# EAGLE board NodeMCU_SMD1206 (EAGLE 9.6.2)
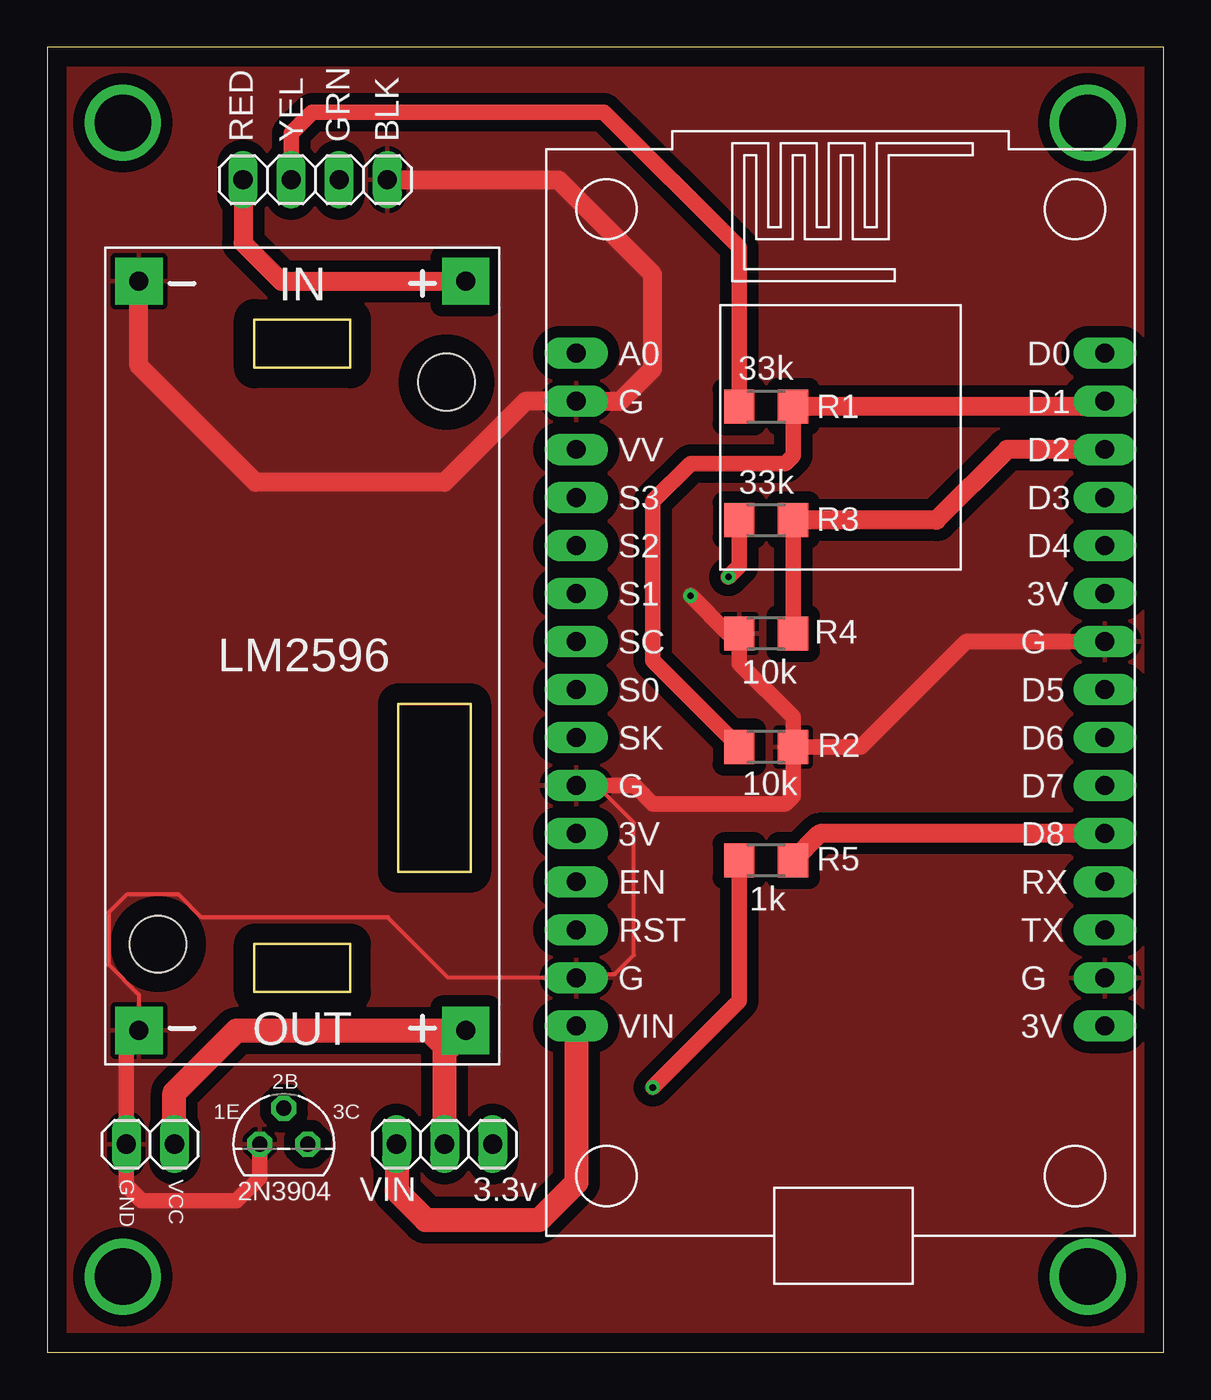
[diagram p0: board, top side]
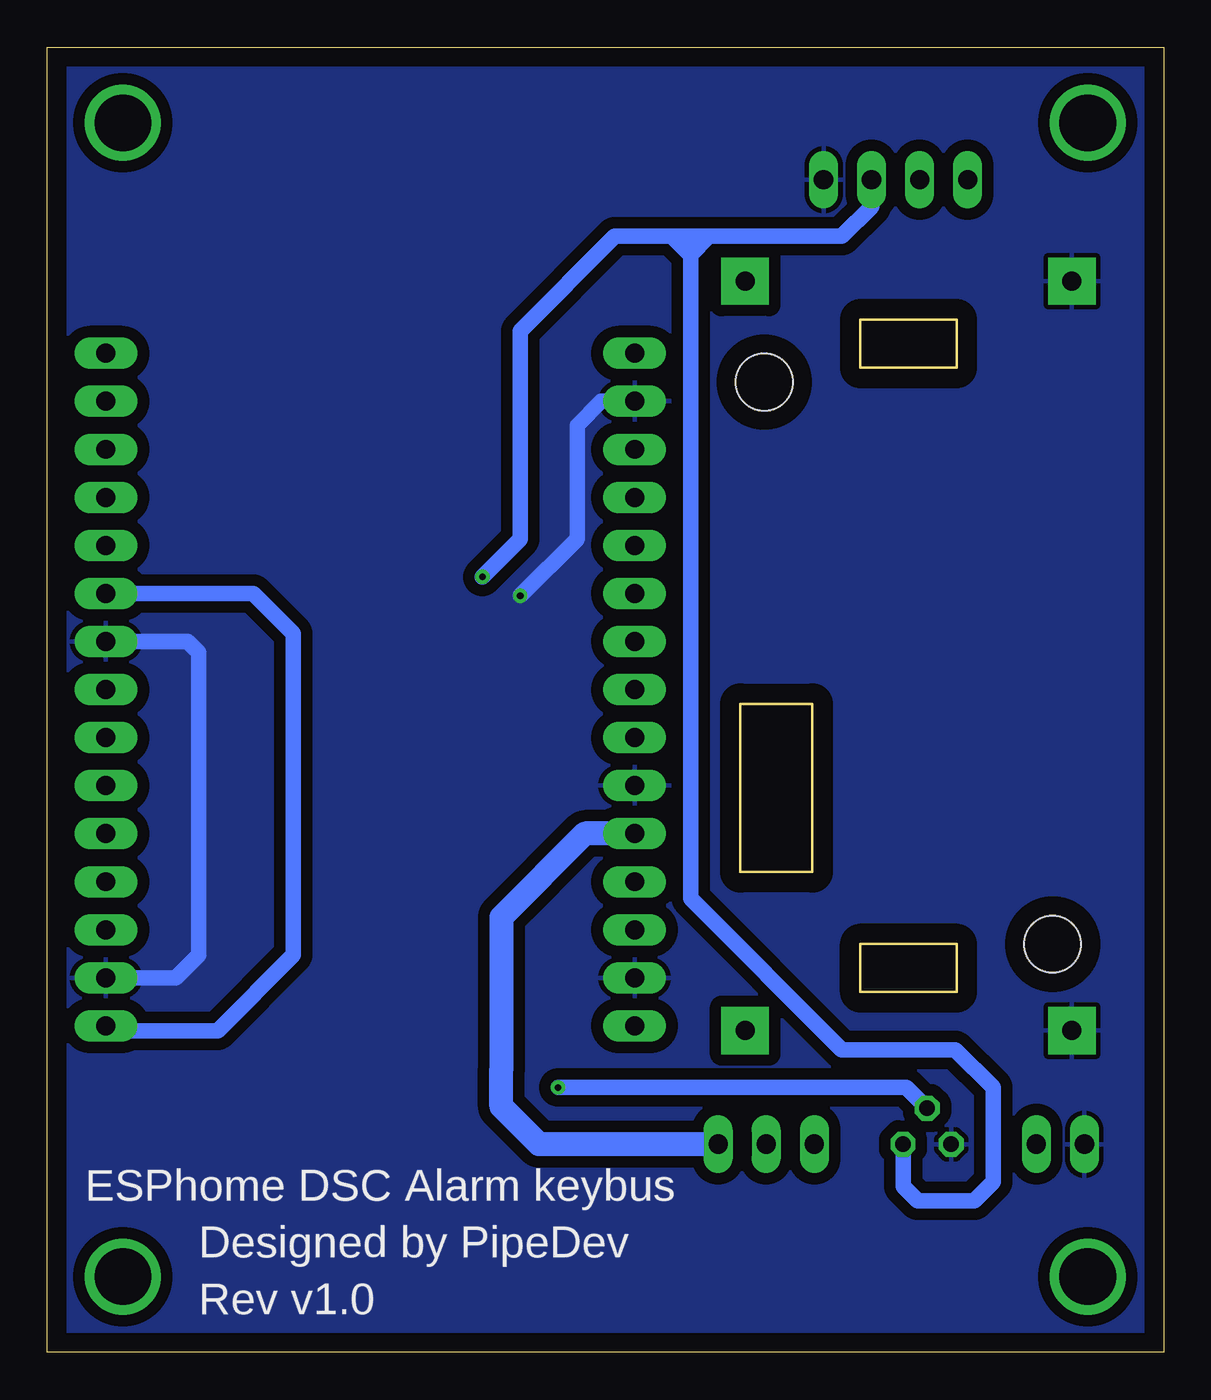
[diagram p1: board, bottom side, seen from below]

Size 59 x 69 mm. Coordinates in mm from the lower left corner, seen from the top.
Outline: 0,0 59,0 59,69 0,69 0,0
Copper layers (1*16): Top 0.035mm / dielectric 1.5mm / Bottom 0.035mm
Design rules "default": minimum track width 6mil, minimum drill 0.35mm, track to track 6mil, track to pad 6mil, pad to pad 6mil, via to via 6mil, smd to smd 6mil, copper to edge 40mil, drill to drill 6mil, minimum pad ring 10mil, minimum via ring 8mil, stop-mask expansion 4mil, vias tented up to drill 0mil, thermal gap 10mil

## Footprints (pad centres in the part's own frame; a part is rotated, then mirrored left to right if it is on the bottom)
1X02 = drill 1.016 long: 1 -1.27,0; 2 1.27,0
1X03 = drill 1.016 long: 1 -2.54,0; 2 0,0; 3 2.54,0
R1206 = smd 1.6 x 1.803: 1 -1.422,0; 2 1.422,0
TO92 = drill 0.813 octagon: 1 1.27,0; 2 0,1.905; 3 -1.27,0
1X04 = drill 1.016 long: 1 -3.81,0; 2 -1.27,0; 3 1.27,0; 4 3.81,0
NODEMCU = drill 1 pad 1.676 long: 1 -13.97,17.78; 2 -13.97,15.24; 3 -13.97,12.7; 4 -13.97,10.16; 5 -13.97,7.62; 6 -13.97,5.08; 7 -13.97,2.54; 8 -13.97,0; 9 -13.97,-2.54; 10 -13.97,-5.08; 11 -13.97,-7.62; 12 -13.97,-10.16; 13 -13.97,-12.7; 14 -13.97,-15.24; 15 -13.97,-17.78; 16 13.97,-17.78; 17 13.97,-15.24; 18 13.97,-12.7; 19 13.97,-10.16; 20 13.97,-7.62; 21 13.97,-5.08; 22 13.97,-2.54; 23 13.97,0; 24 13.97,2.54; 25 13.97,5.08; 26 13.97,7.62; 27 13.97,10.16; 28 13.97,12.7; 29 13.97,15.24; 30 13.97,17.78
DC-DC-STEP-DOWN-LM2596 = drill 1 pad 2.5 square: IN+ -19.812,8.636; IN- -19.812,-8.636; OUT+ 19.812,8.636; OUT- 19.812,-8.636 | hole 3: -14.478,7.62; 15.24,-7.62

## Placement (x,y rotation side)
JP2  [1X02]  5.45,11 180 top
JUMPERS  [1X03]  21,11 180 top
R1  33k  [R1206]  38,50 180 top
R2  10k  [R1206]  38,32 0 top
R3  33k  [R1206]  38,44 180 top
R4  10k  [R1206]  38,38 0 top
R5  1k  [R1206]  38,26 0 top
T1  2N3904  [TO92]  12.5,11 0 top
TERMINALBLOCK  [1X04]  14.16,62 0 top
U$1  NODEMCU  [NODEMCU]  41.93,35.04 0 top
U$2  DC-DC-STEP-DOWN-LM2596  [DC-DC-STEP-DOWN-LM2596]  13.48,36.82 270 top

## Library data of the parts
JP2 TERMINALBLOCK = pinhead
JUMPERS = pinheadDSC1
R1-R5 = rcl; SPICEPREFIX: R
T1 = transistor
U$1 = nodemcu
U$2 = diy-modules

## Nets
3V: U$1.16 U$1.25
GND: JP2.2 R2.2 R4.1 T1.3 TERMINALBLOCK.4 U$1.2 U$1.10 U$1.14 U$1.17 U$1.24 U$2.IN- U$2.OUT-
N$1: R1.1 R2.1 U$1.29
N$2: R1.2 TERMINALBLOCK.2
N$3: R3.1 R4.2 U$1.28
N$4: R3.2 T1.1 TERMINALBLOCK.3
N$5: TERMINALBLOCK.1 U$2.IN+
N$6: JP2.1 JUMPERS.2 U$2.OUT+
N$7: R5.1 T1.2
N$8: R5.2 U$1.20
N$9: JUMPERS.3 U$1.15
N$10: JUMPERS.1 U$1.11

## Tracks (layer width: path | path; a pad name or v marks a point on that pad's centre or on a via)
3V
  Bottom 0.813: U$1.16 55.64,17 50,17 46,21 46,38 48.12,40.12 U$1.25
GND  (via drill 0.35)
  Top 0.2: U$2.OUT- 4.84,18.9 3.24,20.5 3.24,23.24 4.2,24.2 6.94,24.2 8.14,23 18,23 21.2,19.8 U$1.14 28.16,20 30,20 31,21 31,28 29.04,29.96 U$1.10
  Top 0.813: v34,40 36,38 R4.1 36.58,36.42 39.42,33.58 R2.2 | U$1.24 48.58,37.58 43,32 R2.2 | U$1.10 31.04,29.96 32,29 39,29 39.42,29.42 R2.2 | U$2.OUT- 4.18,16.34 JP2.2 4.18,8.82 5,8 10,8 11.23,9.23 T1.3
  Top 1: TERMINALBLOCK.4 27.01,61.99 32,57 32,52 30.28,50.28 U$1.2 25.28,50.28 21,46 11,46 4.84,52.16 U$2.IN-
  Bottom 0.813: v34,40 31,43 31,49 29.72,50.28 U$1.2 | U$1.24 51.58,37.58 51,37 51,21 52.2,19.8 U$1.17
  pour Top (isolate 0.61): 0,69 59,69 59,0 0,0
  pour Bottom (isolate 0.61): 0,69 59,69 59,0 0,0
N$1
  Top 0.813: R1.1 39.42,47.42 39,47 34,47 32,45 32,36.58 R2.1
  Top 1: U$1.29 55.62,50 R1.1
N$2
  Top 0.813: TERMINALBLOCK.2 12.89,64.47 14,65.58 29.42,65.58 36.58,58.42 R1.2
N$3
  Top 0.813: R3.1 R4.2
  Top 1: U$1.28 50.74,47.74 47,44 R3.1
N$4  (via drill 0.35)
  Top 0.813: R3.2 36.58,41.58 v36,41
  Bottom 0.813: TERMINALBLOCK.3 15.43,60.57 17,59 24,59 | v36,41 34,43 34,54 29,59 26,59 | 26,59 24,59 | 25,58 25,24 17,16 11,16 9,14 9,12 9,11 9,9 10,8 13,8 13.77,8.77 T1.1 | 24,59 25,58 | 25,58 26,59
N$5
  Top 1: TERMINALBLOCK.1 10.35,58.65 12.37,56.63 U$2.IN+
N$6
  Top 0.813: 21,15.89 20,16.89 20,17.01
  Top 1.27: JP2.1 6.72,13.72 10.01,17.01 20,17.01 U$2.OUT+ 21,15.89 JUMPERS.2
N$7  (via drill 0.35)
  Top 0.813: v32,14 36.58,18.58 R5.1
  Bottom 0.813: v32,14 14,14 13.82,14 13.6,14 T1.2
N$8
  Top 1: U$1.20 40.84,27.42 R5.2
N$9
  Top 1.27: U$1.15 27.96,8.96 26,7 20,7 18.46,8.54 JUMPERS.3
N$10
  Bottom 1.27: U$1.11 30.58,27.42 35,23 35,16 35,15 35,13 33,11 JUMPERS.1
N$11  (via drill 3)
  other vias: 4,65
N$12  (via drill 3)
  other vias: 55,65
N$13  (via drill 3)
  other vias: 4,4
N$14  (via drill 3)
  other vias: 55,4

## Text on the board
tNames: RED | YEL | GRN | BLK | LM2596 | 2B | 1E | 3C | GND | VCC | 2N3904 | VIN | 3.3v
bNames: ESPhome DSC Alarm keybus | Designed by PipeDev | Rev v1.0